# Altium PCB Radar_1GHz.PcbDoc (part 1 of 2)
Units mm, origin at the board's own origin, x right, y up, seen from the top; angles counter-clockwise.
Board outline 125 x 80 mm, 4 copper layers (Top Layer - RF, Layer 1 - GND, Layer 2 - GND, Bottom Layer - PWR), stack 1.591 mm thick; 163 components, 78 nets, 431 pads, 238 vias.
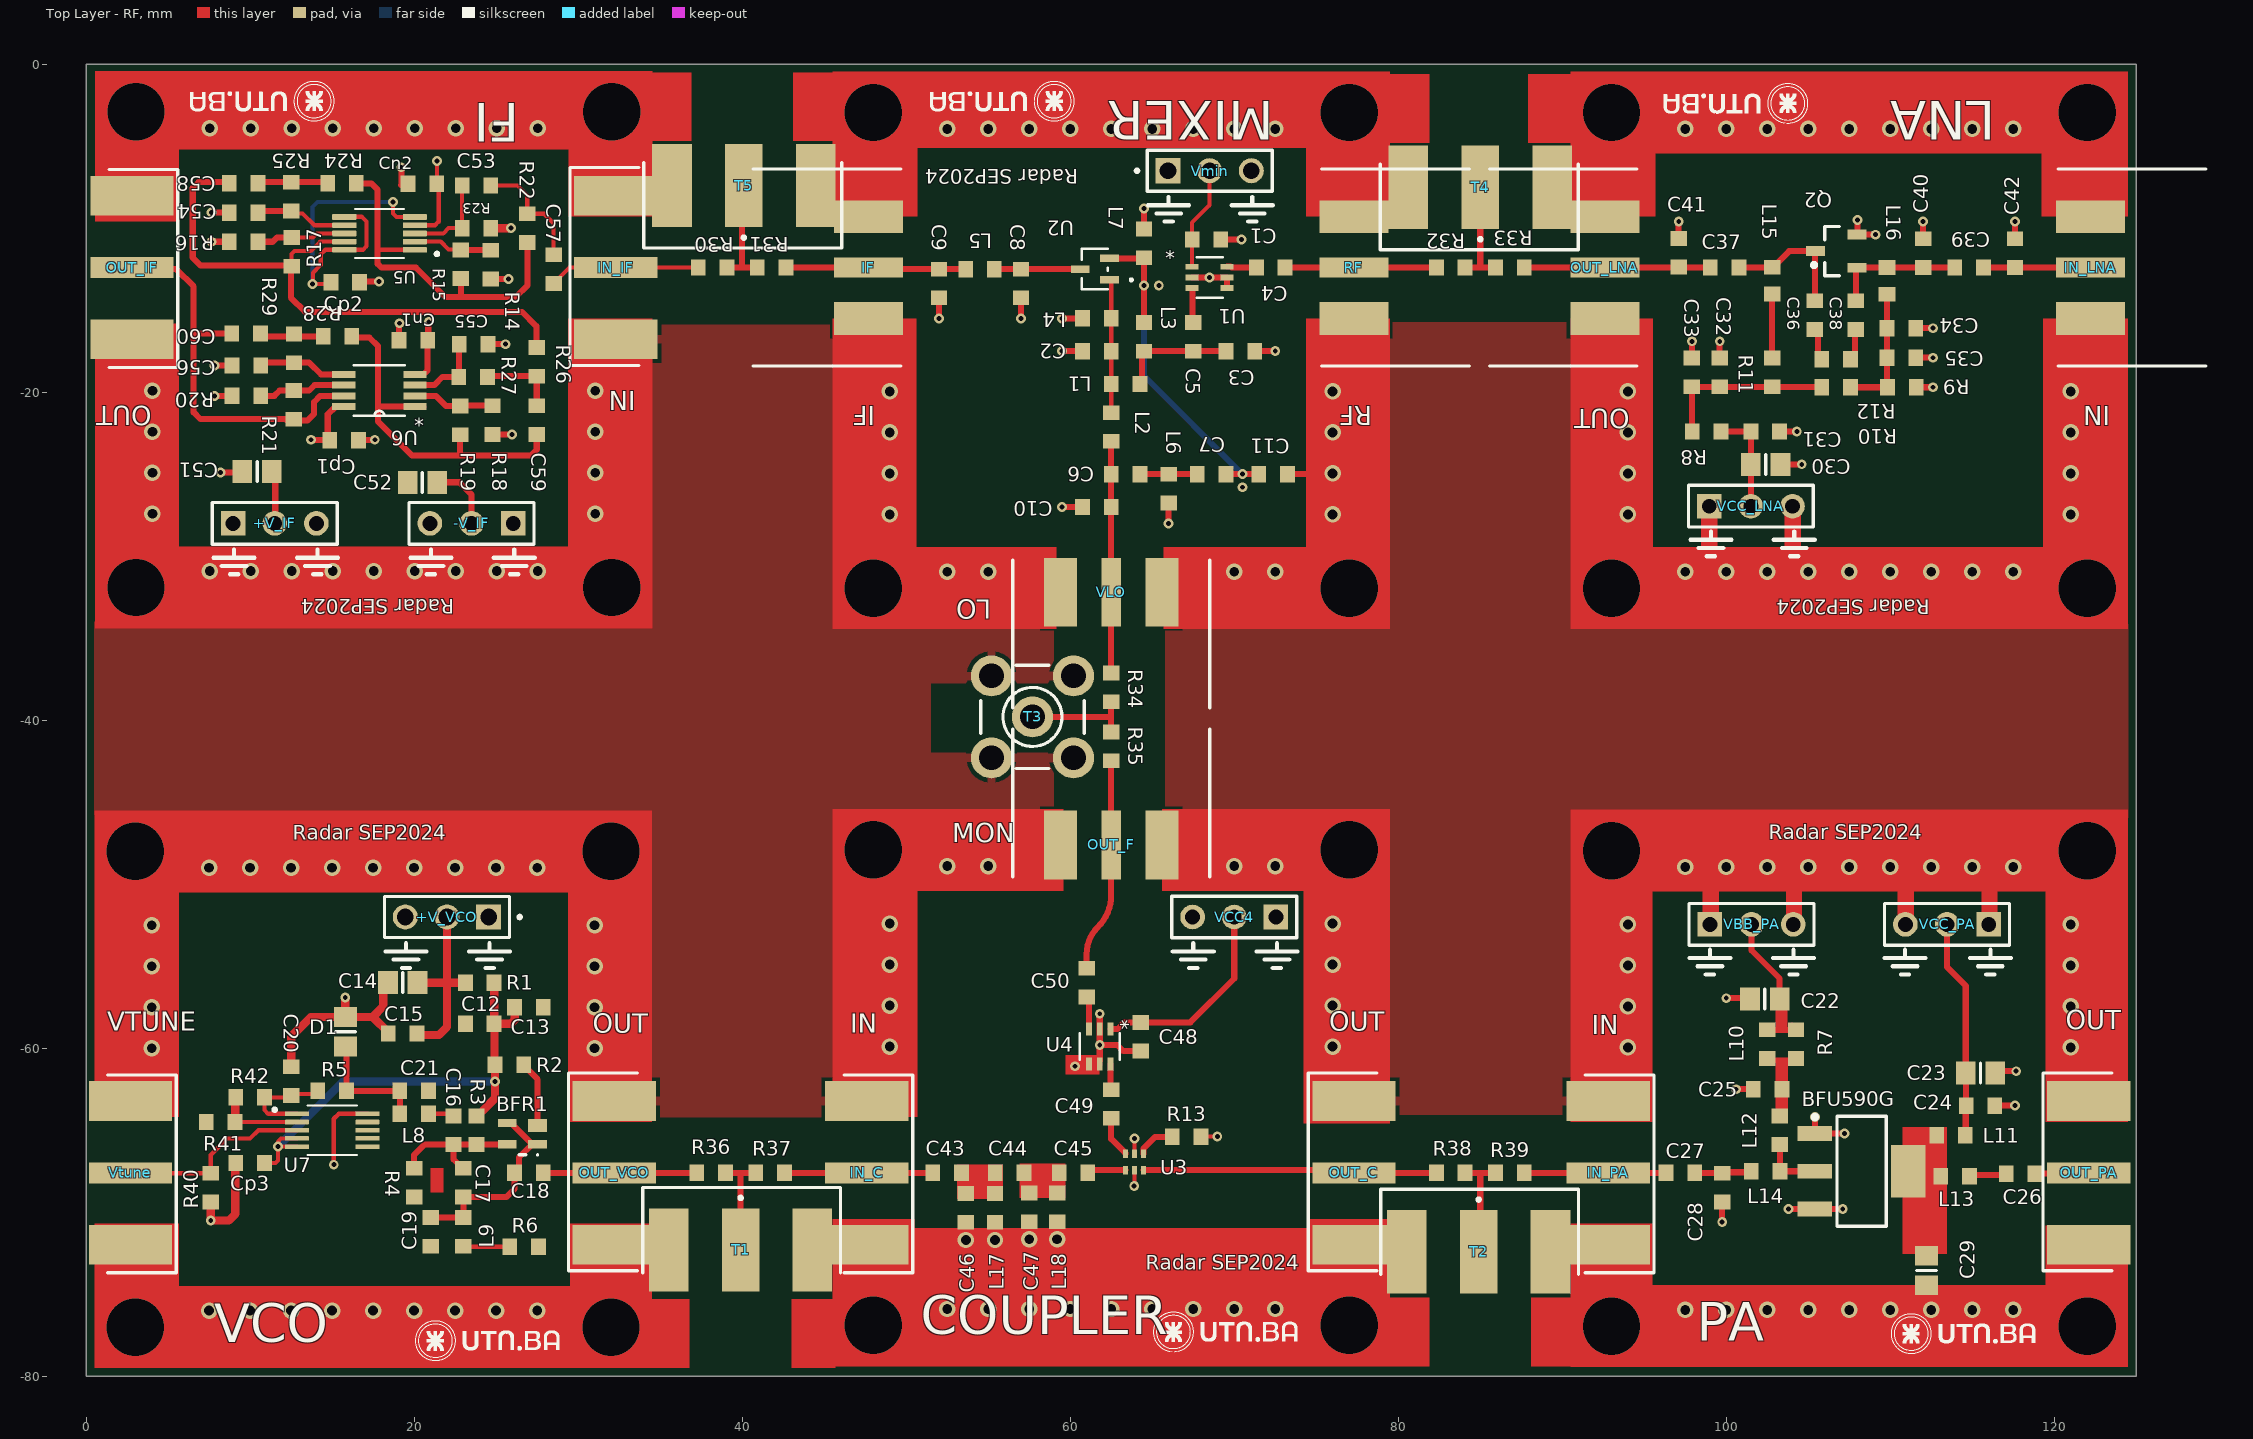
[diagram p0: Top Layer - RF view]
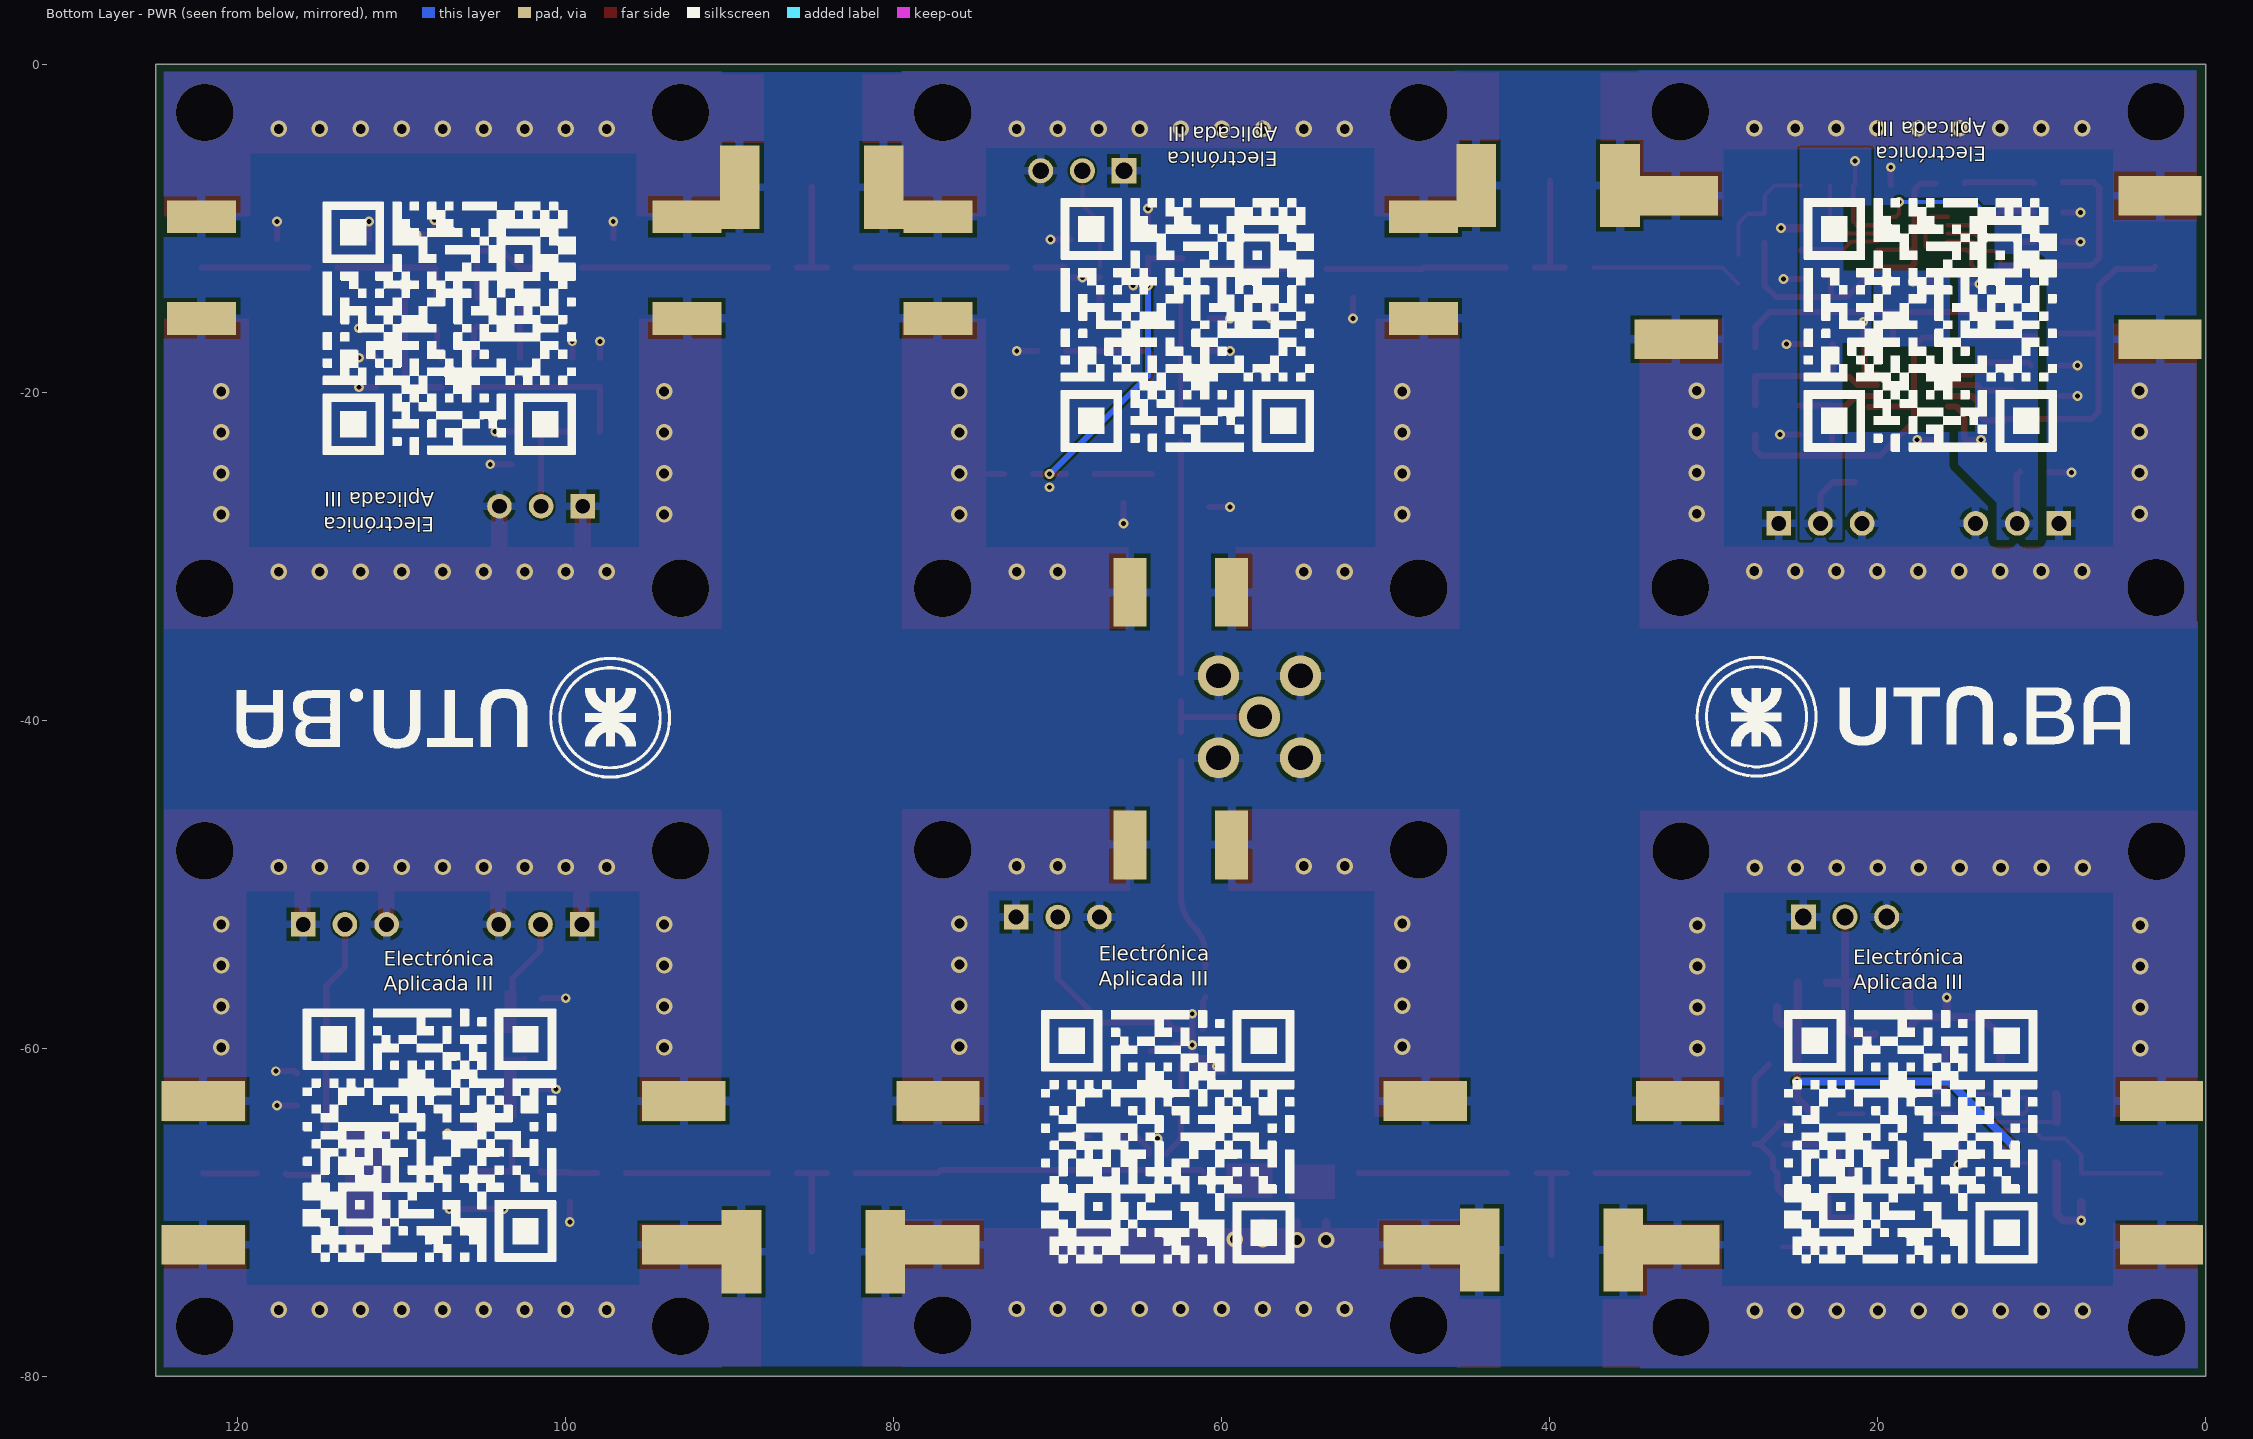
[diagram p1: Bottom Layer - PWR view, seen from below]
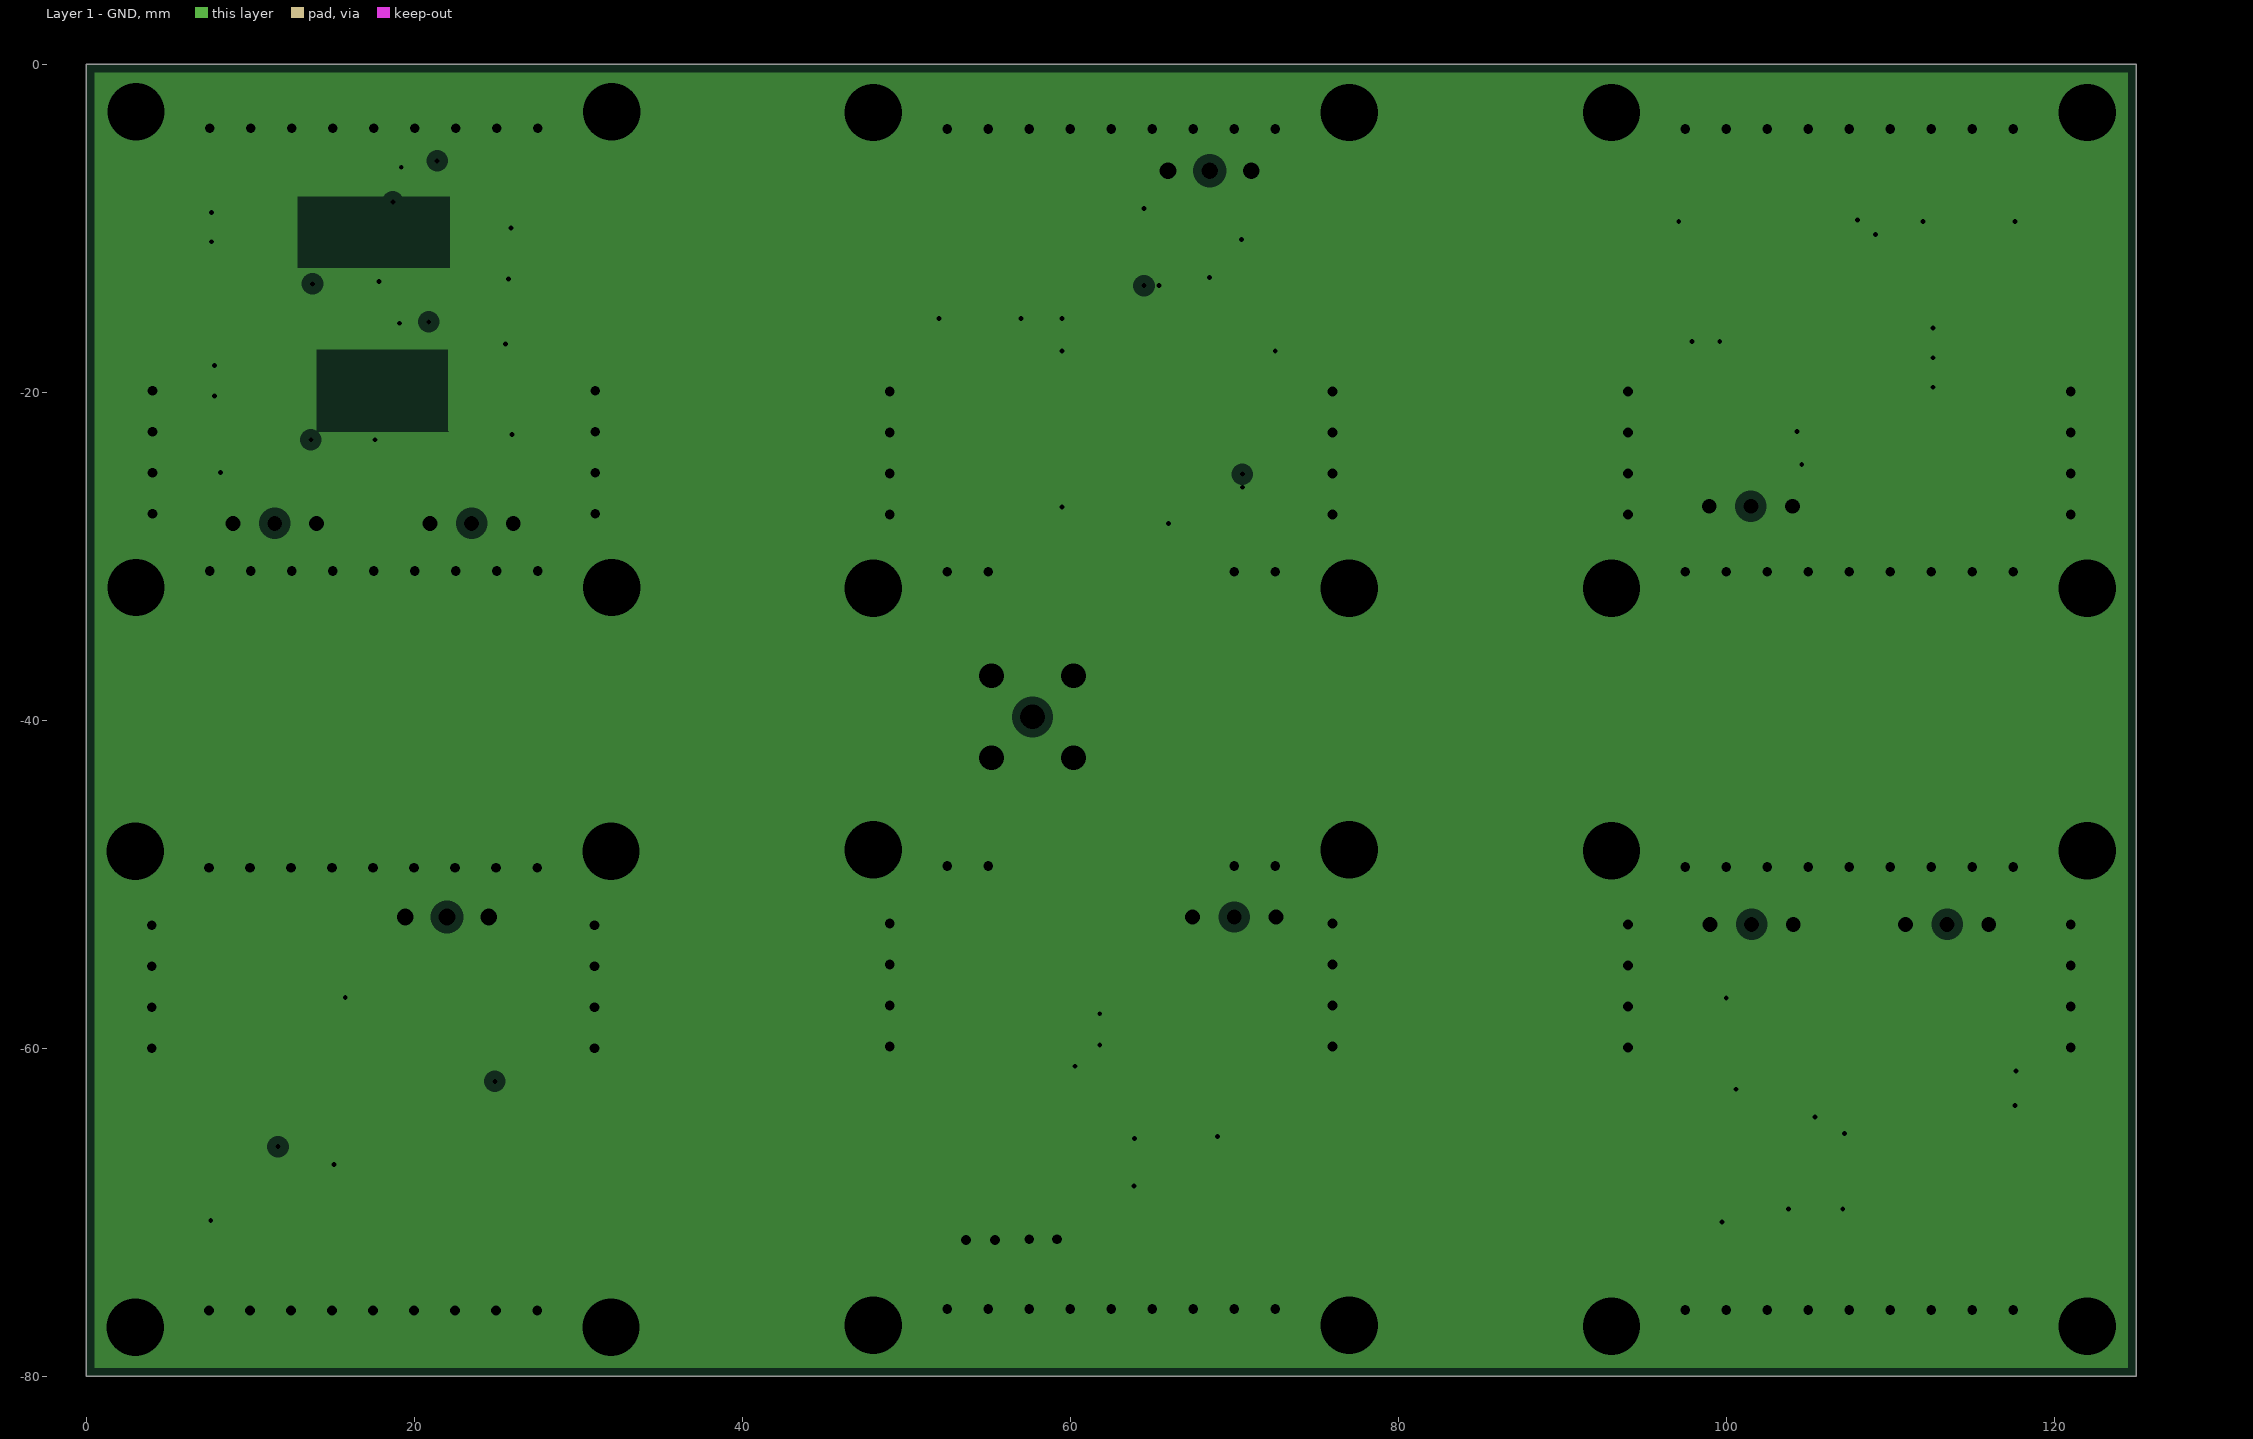
[diagram p2: Layer 1 - GND, clearances drawn from the general rule]
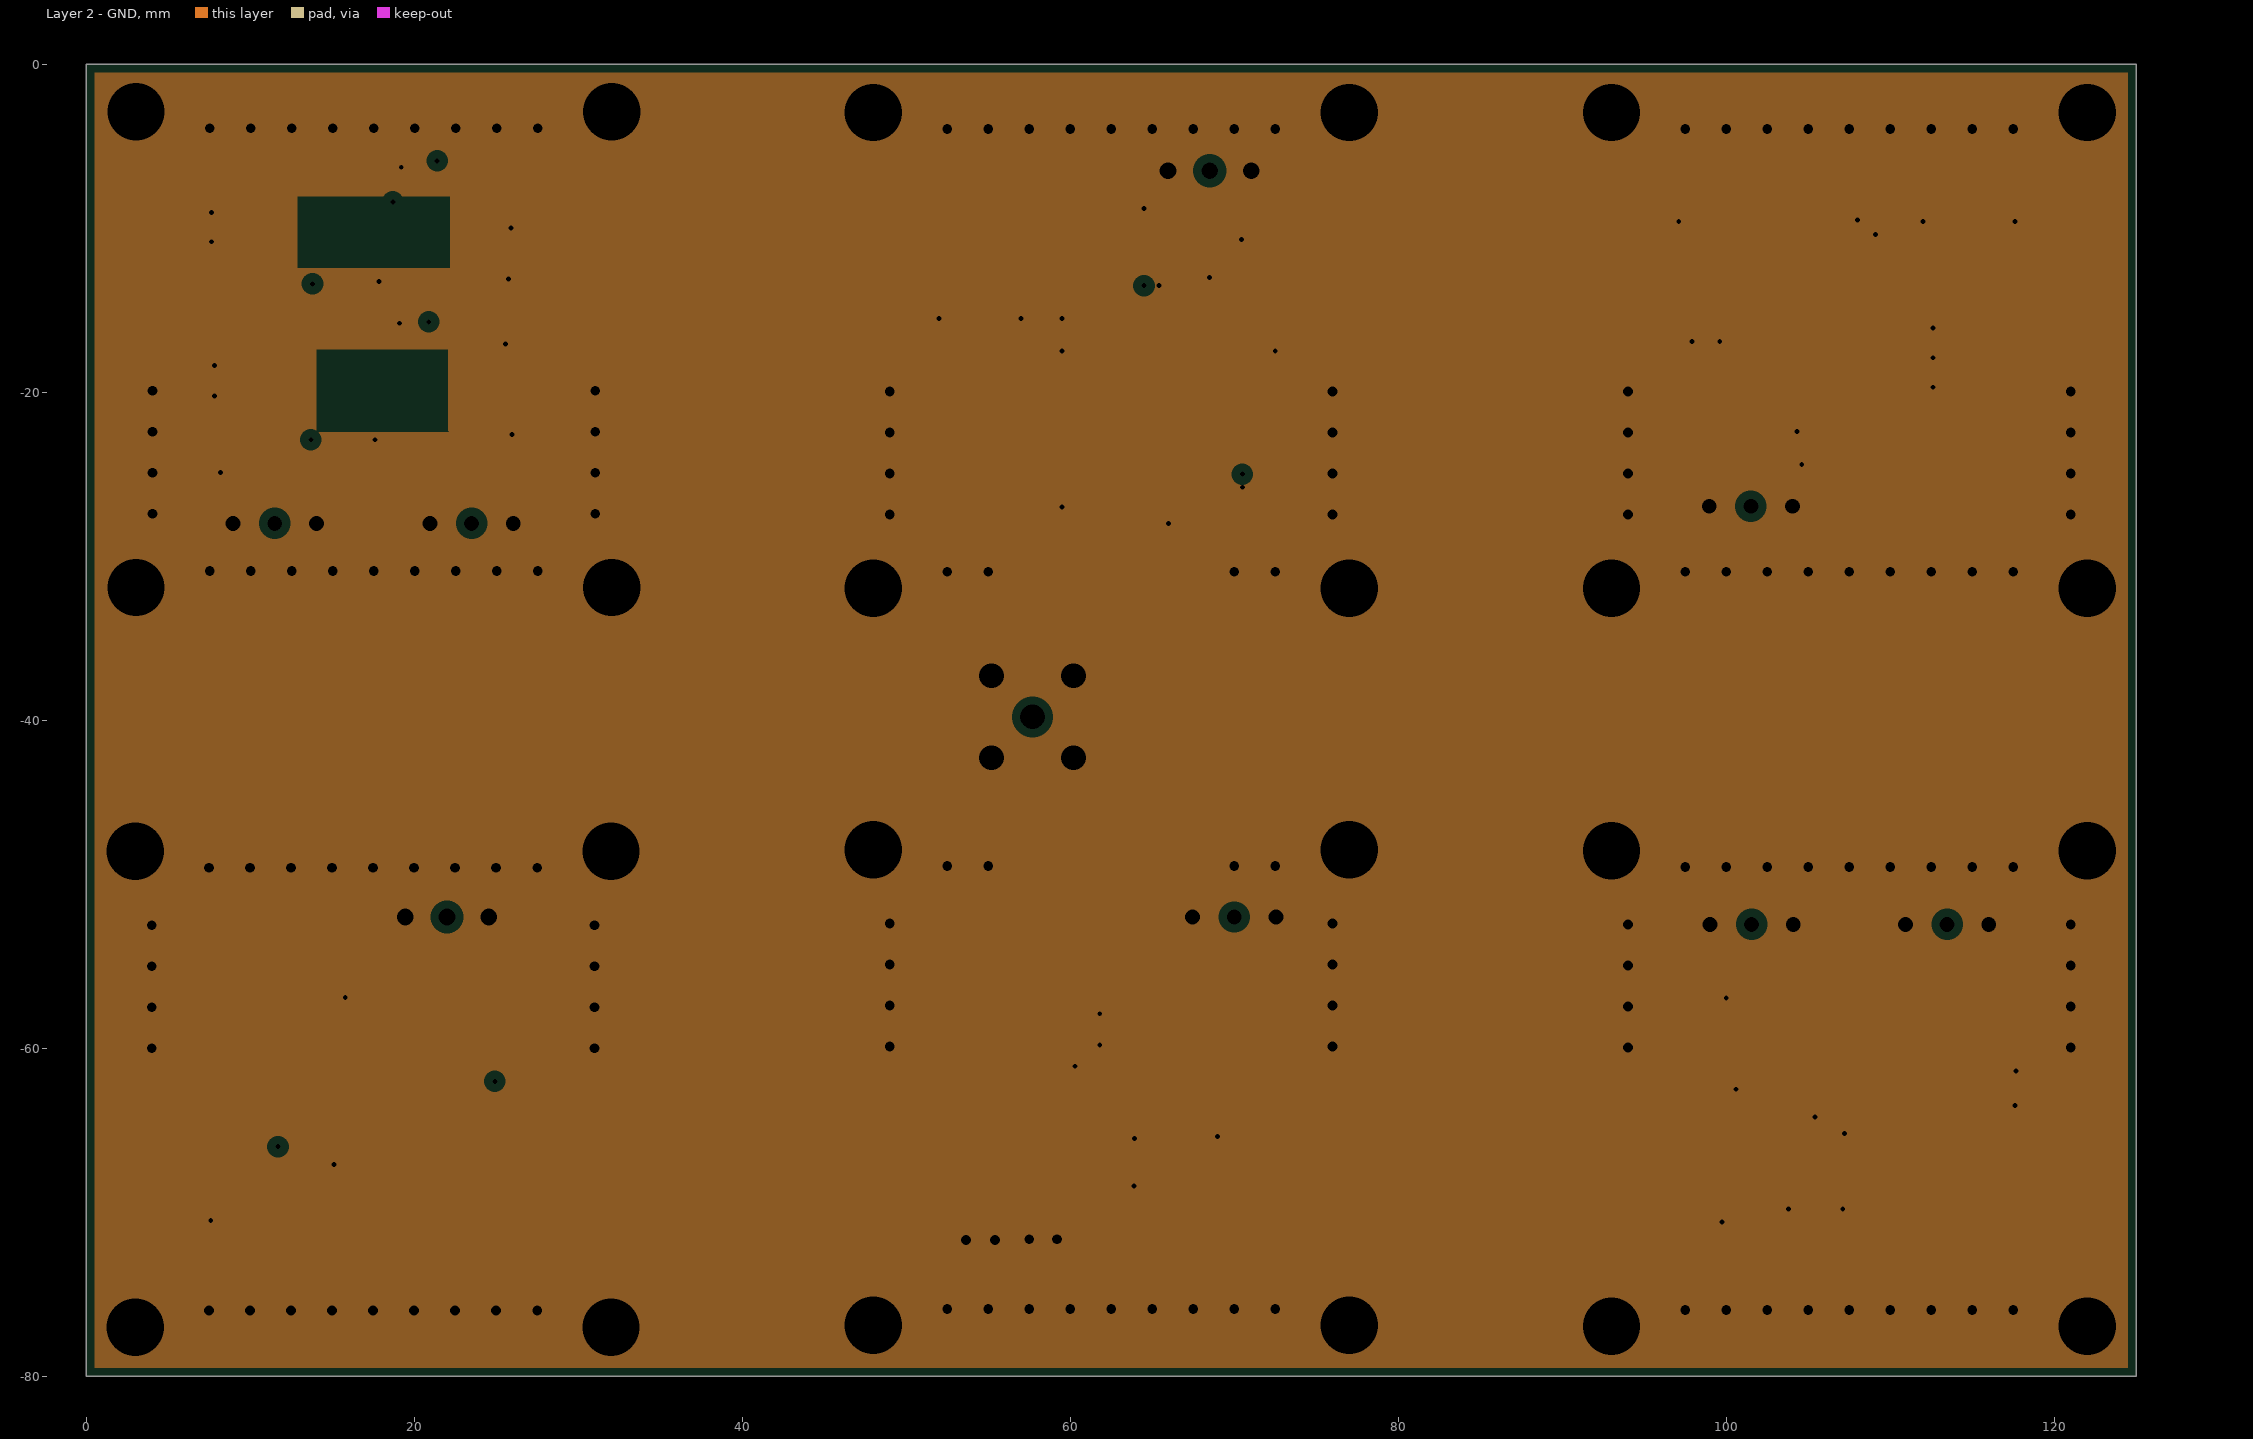
[diagram p3: Layer 2 - GND, clearances drawn from the general rule]

## Layer stack, top to bottom
Top Solder: solder mask 0.0254, SM-001, Dk 4
Top Layer - RF: signal copper 0.035
Prepeg 1: prepreg 0.2104, PP-006, Dk 4.4
Layer 1 - GND: plane copper 0.0175, net GND
Dielectric 1: core 1.065, FR4, Dk 4.6
Layer 2 - GND: plane copper 0.0175, net GND
Prepeg 2: prepreg 0.2104, PP-006, Dk 4.4
Bottom Layer - PWR: signal copper 0.035
Bottom Solder: solder mask 0.0254, SM-001, Dk 4

## Board outline
0,-80 125,-80 125,0 0,0

## Design rules (kind name [scope] priority, off if disabled: settings)
Clearance poly_top [InNamedPolygon('V+_sallen')] p1: gap=0.5 ignorepadtopadclearanceinfootprint=FALSE except(0: Arc-Hole Track-Hole SMDPad-Hole THPad-Hole Via-Hole Fill-Hole Poly-Hole Region-Hole Text-Hole)
Clearance poly_fi [InNamedPolygon('GND_L02_P006')] p2: gap=0.5 ignorepadtopadclearanceinfootprint=FALSE except(0: Arc-Hole Track-Hole SMDPad-Hole THPad-Hole Via-Hole Fill-Hole Poly-Hole Region-Hole Text-Hole)
Clearance poly_dc [InNamedPolygon('GND_L02_P005')] p3: gap=0.5 ignorepadtopadclearanceinfootprint=FALSE except(0: Arc-Hole Track-Hole SMDPad-Hole THPad-Hole Via-Hole Fill-Hole Poly-Hole Region-Hole Text-Hole)
Clearance poly_lna [InNamedPolygon('GND_L02_P004')] p4: gap=0.5 ignorepadtopadclearanceinfootprint=FALSE except(0: Arc-Hole Track-Hole SMDPad-Hole THPad-Hole Via-Hole Fill-Hole Poly-Hole Region-Hole Text-Hole)
Clearance poly_pa [InNamedPolygon('GND_L02_P003')] p5: gap=0.5 ignorepadtopadclearanceinfootprint=FALSE except(0: Arc-Hole Track-Hole SMDPad-Hole THPad-Hole Via-Hole Fill-Hole Poly-Hole Region-Hole Text-Hole)
Clearance poly_vco [InNamedPolygon('GND_L02_P001')] p6: gap=0.5 ignorepadtopadclearanceinfootprint=FALSE except(0: Arc-Hole Track-Hole SMDPad-Hole THPad-Hole Via-Hole Fill-Hole Poly-Hole Region-Hole Text-Hole)
Clearance poly_0 [InNamedPolygon('GND_L02_P000')] p7: gap=0.5 ignorepadtopadclearanceinfootprint=FALSE except(0: Arc-Hole Track-Hole SMDPad-Hole THPad-Hole Via-Hole Fill-Hole Poly-Hole Region-Hole Text-Hole)
Clearance [All] p8: gap=0.127 ignorepadtopadclearanceinfootprint=FALSE except(0: Arc-Hole Track-Hole SMDPad-Hole THPad-Hole Via-Hole Fill-Hole Poly-Hole Region-Hole Text-Hole)
ComponentClearance [All] p1: gap=0.01 collisioncheckmode=3 verticalgap=2540 showdistances=TRUE donotcheckwithout3dbody=TRUE
HoleSize [All] p1: absolutevalues=TRUE maxlimit=5 minlimit=0.025 maxpercent=80.000 minpercent=20.000
MinimumSolderMaskSliver [All] p1: minsoldermaskwidth=0.01
PlaneClearance plane_clearance_vias [IsVia] p1: clearance=0.152
PlaneClearance [All] p2: clearance=0.508
PlaneConnect PlaneConnect_vias [IsVia] p1: planeconnectstyle=Direct reliefexpansion=0.508 reliefentries=4 reliefconductorwidth=0.254 reliefairgap=0.254
PlaneConnect [All] p2: planeconnectstyle=Relief reliefexpansion=0.508 reliefentries=4 reliefconductorwidth=0.254 reliefairgap=0.254
PolygonConnect PolygonConnect_via [IsVia vs IsPolygon] p1: connectstyle=Direct reliefconductorwidth=0.254 reliefentries=4 polygonreliefangle="90 Angle" airgapwidth=0.254
PolygonConnect [All] p2: connectstyle=Relief reliefconductorwidth=0.5 reliefentries=4 polygonreliefangle="90 Angle" airgapwidth=0.254
RoomDefinition LOW_NOISE_AMPLIFIER [InComponentClass('LOW_NOISE_AMPLIFIER')] p1: confinementstyle=ConfineIn formatcopy=TRUE lockcomponents=FALSE outline 84.7,-40.3 130.1,-40.3 130.1,4.4 84.7,4.4
RoomDefinition DIRECTIONAL_COUPLER [InComponentClass('DIRECTIONAL_COUPLER')] p2: confinementstyle=ConfineIn formatcopy=TRUE lockcomponents=FALSE outline 40.3,-84 85.1,-84 85.1,-40 40.3,-40
RoomDefinition AMPLIFIER_IF [InComponentClass('AMPLIFIER_IF')] p3: confinementstyle=ConfineIn formatcopy=TRUE lockcomponents=FALSE outline -7.3,-41.2 40.3,-41.2 40.3,9.3 -7.3,9.3
RoomDefinition VCO [InComponentClass('VCO')] p4: confinementstyle=ConfineIn formatcopy=TRUE lockcomponents=FALSE outline -7.2,-84.5 39.4,-84.5 39.4,-39.8 -7.2,-39.8
RoomDefinition POWER_AMPLIFIER [InComponentClass('POWER_AMPLIFIER')] p5: confinementstyle=ConfineIn formatcopy=TRUE lockcomponents=FALSE outline 85.1,-85.4 134,-85.4 134,-39.3 85.1,-39.3
RoomDefinition MIXER [InComponentClass('MIXER')] p6: confinementstyle=ConfineIn formatcopy=TRUE lockcomponents=FALSE outline 38.9,-41.2 85.5,-41.2 85.5,8.4 38.9,8.4
RoomDefinition Completo [InComponentClass('Completo')] p7: confinementstyle=ConfineIn formatcopy=TRUE lockcomponents=FALSE outline -47,-96.7 127.4,-96.7 127.4,22.1 -47,22.1
RoutingVias [All] p1: holewidth=0.3 width=0.3 viastyle="Through Hole" minholewidth=0.2 minwidth=0.4 maxholewidth=0.3 maxwidth=0.3
SilkToSilkClearance [All] p1: silktosilkclearance=0.1
SilkToSolderMaskClearance [IsPad] p1: minsilkscreentomaskgap=0.152 clearancetoexposedcopper=TRUE
SolderMaskExpansion [All] p1: expansion=0.102 istentingtop=FALSE
SupplyNets "Schematic Supply Nets_3" [InNet('VCO+')] p1: voltage=0.000
SupplyNets "Schematic Supply Nets_2" [InNet('V-')] p2: voltage=0.000
SupplyNets "Schematic Supply Nets_1" [InNet('GND')] p3: voltage=0.000
SupplyNets "Schematic Supply Nets" [InNet('V+')] p4: voltage=0.000
Width GND_Width [InNet('GND')] p1: maxlimit=2.54 minlimit=0 preferedwidth=0.254 minimp=50.000000 maximp=50.000000 favimp=50.000000
Width RF50R [InNetClass('RF50R')] p2: maxlimit=2.54 minlimit=0.254 preferedwidth=0.368 impedanceprofiledriven=TRUE impedanceprofileid={3E6CA8BA-64D6-413C-9399-F518D5D78D00} impedanceprofilevalue=50.000000 minimp=50.000000 maximp=50.000000 favimp=50.000000
Width Width_1 [All] p3: maxlimit=0.508 minlimit=0.254 preferedwidth=0.254 minimp=50.000000 maximp=50.000000 favimp=50.000000
23 further rules are at their usual default settings.

## Classes and differential pairs
net class RF50R: B C GND Net+V_VCO_02 NetBFR1_1 NetBFU590G_2 NetBFU590G_4 NetC3_1 NetC4_1 NetC4_2 NetC5_1 NetC6_1 NetC6_2 NetC8_2 NetC9_2 NetC16_2 NetC18_1 NetC20_2 NetC21_1 NetC22_1 NetC23_1 NetC25_2 NetC26_1 NetC26_2 NetC27_1 NetC27_2 NetC32_1 NetC34_2 NetC36_1 NetC36_2 NetC37_2 NetC38_1 NetC38_2 NetC39_1 NetC43_1 NetC43_2 NetC44_2 NetC45_2 NetC48_2 NetC49_1 NetC49_2 NetC50_1 NetC50_2 NetL9_1 NetL15_2 NetOUT_C_1 NetR13_2 NetR30_2 NetR32_2 NetR34_1 NetR36_2 NetR38_2 NetR40_2 NetR41_2 p3 p4 VCO+
component class Completo: R30 R31 R32 R33 R34 R35 R36 R37 R38 R39 T1 T2 T3 T4 T5
component class AMPLIFIER_IF: +V_IF -V_IF C51 C52 C53 C54 C55 C56 C57 C58 C59 C60 Cn1 Cn2 Cp1 Cp2 IN_IF OUT_IF R14 R15 R16 R17 R18 R19 R20 R21 R22 R23 R24 R25 R26 R27 R28 R29 U5 U6
component class DIRECTIONAL_COUPLER: C43 C44 C45 C46 C47 C48 C49 C50 IN_C L17 L18 OUT_C OUT_F R13 U3 U4 VCC4
component class LOW_NOISE_AMPLIFIER: C30 C31 C32 C33 C34 C35 C36 C37 C38 C39 C40 C41 C42 IN_LNA L15 L16 OUT_LNA Q2 R8 R9 R10 R11 R12 VCC_LNA
component class POWER_AMPLIFIER: BFU590G C22 C23 C24 C25 C26 C27 C28 C29 IN_PA L10 L11 L12 L13 L14 OUT_PA R7 VBB_PA VCC_PA
component class VCO: +V_VCO BFR1 C12 C13 C14 C15 C16 C17 C18 C19 C20 C21 Cp3 D1 L8 L9 OUT_VCO Q R1 R2 R3 R4 R5 R6 R40 R41 R42 U7 Vtune
component class MIXER: C1 C2 C3 C4 C5 C6 C7 C8 C9 C10 C11 IF L1 L2 L3 L4 L5 L6 L7 RF U1 U2 VLO Vmin

## Components (designator, comment, footprint, x,y, rotation, side; value= is the part's Value field where it differs from the comment)
+V_IF "Header 3" HDR1X3 8.96,-28 r0 top
+V_VCO "HTSW-103-XX-X-S" SAMTEC_HTSW-103-XX-X-S 22,-52 r0 top
-V_IF "Header 3" HDR1X3 26.04,-28 r180 top
BFR1 "BFP420" SOT-343_N 26.6,-65.2 r180 top
BFU590G "NPN" SOT223_L 108.25,-67.5 r0 top
C1 "Cap 0603" CAPC1608X90N 68.308,-10.692 r180 top value=0.6pF
C2 "Cap 0603" CAPC1608X90N 61.625,-17.5 r180 top value=0.6pF
C3 "Cap 0603" CAPC1608X90N 70.375,-17.5 r0 top value=0.6pF
C4 "Cap 0603" CAPC1608X90N 72.225,-12.4 r180 top value=0.6pF
C5 "Cap 0603" CAPC1608X90N 67.5,-16.625 r270 top value=0.6pF
C6 "Cap 0603" CAPC1608X90N 63.375,-25 r0 top value=0.6pF
C7 "Cap 0603" CAPC1608X90N 68.625,-25 r0 top value=0.6pF
C8 "Cap 0603" CAPC1608X90N 57,-13.375 r90 top value=0.6pF
C9 "Cap 0603" CAPC1608X90N 52,-13.375 r90 top value=0.6pF
C10 "Cap 0603" CAPC1608X90N 61.625,-27 r0 top value=0.6pF
C11 "Cap 0603" CAPC1608X90N 72.375,-25 r180 top value=0.6pF
C12 "Cap 0603" CAPC1608X90N 24,-58.5 r0 top value=0.6pF
C13 "Cap 0603" CAPC1608X90N 27,-57.5 r180 top value=0.6pF
C14 "1uF" 6-0805_N 19.3,-56 r180 top value=22nF
C15 "Cap 0603" CAPC1608X90N 19.3,-59.1 r0 top value=0.6pF
C16 "Cap 0603" CAPC1608X90N 22.4,-65 r90 top value=0.6pF
C17 "Cap 0603" CAPC1608X90N 23,-68.2 r90 top value=0.6pF
C18 "Cap 0603" CAPC1608X90N 27,-67.6 r180 top value=0.6pF
C19 "Cap 0603" CAPC1608X90N 21,-71.2 r90 top value=0.6pF
C20 "Cap 0603" CAPC1608X90N 12.5,-62 r270 top value=0.6pF
C21 "Cap 0603" CAPC1608X90N 20,-62.6 r0 top value=0.6pF
C22 "10uF" 6-0805_N 102.35,-57 r180 top
C23 "22nF" 6-0805_N 115.5,-61.5 r0 top
C24 "Cap 0603" CAPC1608X90N 115.5,-63.5 r0 top value=0.6pF
C25 "Cap 0603" CAPC1608X90N 102.525,-62.5 r0 top value=0.6pF
C26 "Cap 0603" CAPC1608X90N 117.95,-67.65 r0 top value=0.6pF
C27 "Cap 0603" CAPC1608X90N 97.2,-67.6 r0 top value=0.6pF
C28 "Cap 0603" CAPC1608X90N 99.75,-68.5 r90 top value=0.6pF
C29 "no mounted" 6-0805_N 112.2,-73.55 r270 top value=100pF
C30 "22nF" 6-0805_N 102.4,-24.4 r0 top
C31 "Cap 0603" CAPC1608X90N 102.375,-22.4 r0 top value=0.6pF
C32 "Cap 0603" CAPC1608X90N 99.6,-18.8 r90 top value=0.6pF
C33 "Cap 0603" CAPC1608X90N 97.9,-18.8 r90 top value=0.6pF
C34 "Cap 0603" CAPC1608X90N 110.675,-16.1 r180 top value=0.6pF
C35 "Cap 0603" CAPC1608X90N 110.675,-17.9 r180 top value=0.6pF
C36 "Cap 0603" CAPC1608X90N 105.4,-15.3 r270 top value=0.6pF
C37 "Cap 0603" CAPC1608X90N 99.9,-12.4 r180 top value=0.6pF
C38 "Cap 0603" CAPC1608X90N 107.9,-15.3 r270 top value=0.6pF
C39 "Cap 0603" CAPC1608X90N 114.8,-12.4 r180 top value=0.6pF
C40 "Cap 0603" CAPC1608X90N 112,-11.525 r270 top value=0.6pF
C41 "Cap 0603" CAPC1608X90N 97.1,-11.5 r270 top value=0.6pF
C42 "Cap 0603" CAPC1608X90N 117.6,-11.525 r270 top value=0.6pF
C43 "Cap 0603" CAPC1608X90N 52.5,-67.6 r0 top value=0.6pF
C44 "Cap 0603" CAPC1608X90N 56.3,-67.6 r0 top value=0.6pF
C45 "Cap 0603" CAPC1608X90N 60.2,-67.6 r0 top value=0.6pF
C46 "Cap 0603" CAPC1608X90N 53.636,-69.74 r90 top value=0.6pF
C47 "Cap 0603" CAPC1608X90N 57.5,-69.7 r90 top value=0.6pF
C48 "Cap 0603" CAPC1608X90N 64.3,-59.3 r90 top value=0.6pF
C49 "Cap 0603" CAPC1608X90N 62.5,-63.4 r90 top value=0.6pF
C50 "Cap 0603" CAPC1608X90N 61,-56 r90 top value=0.6pF
C51 "1uF" 6-0805_N 10.425,-24.85 r180 top
C52 "1uF" 6-0805_N 20.5,-25.5 r0 top
C53 "Cap 0603" CAPC1608X90N 23.8,-7.4 r0 top value=0.6pF
C54 "Cap 0603" CAPC1608X90N 9.599,-9.052 r0 top value=0.6pF
C55 "Cap 0603" CAPC1608X90N 23.625,-17.075 r180 top value=0.6pF
C56 "Cap 0603" CAPC1608X90N 9.775,-18.375 r0 top value=0.6pF
C57 "Cap 0603" CAPC1608X90N 28.5,-12.5 r270 top value=0.6pF
C58 "Cap 0603" CAPC1608X90N 9.599,-7.274 r0 top value=0.6pF
C59 "Cap 0603" CAPC1608X90N 27.475,-21.7 r90 top value=0.6pF
C60 "Cap 0603" CAPC1608X90N 9.75,-16.425 r0 top value=0.6pF
Cn1 "Cap 0603" CAPC1608X90N 19.95,-16.825 r0 top value=0.6pF
Cn2 "Cap 0603" CAPC1608X90N 20.5,-7.3 r0 top value=0.6pF
Cp1 "Cap 0603" CAPC1608X90N 15.725,-22.925 r180 top value=0.6pF
Cp2 "Cap 0603" CAPC1608X90N 15.8,-13.3 r180 top value=0.6pF
Cp3 "Cap 0603" CAPC1608X90N 10,-67 r180 top value=0.6pF
D1 "SMV1232" 6-0805_N 15.8,-59 r270 top
IF "SMA" SMA-142-0701-851#1 47.7,-12.4 r270 top
IN_C "SMA" SMA-142-0701-851_V2 47.6,-67.6 r270 top
IN_IF "SMA" SMA-142-0701-851_V2 32.3,-12.4 r90 top
IN_LNA "SMA" SMA-142-0701-851#1 122.2,-12.4 r90 top
IN_PA "SMA" SMA-142-0701-851_V2 92.8,-67.6 r270 top
L1 "LQW18" INDC1608X100N#1 63.375,-19.5 r0 top value=1nHy
L2 "LQW18" INDC1608X100N#1 62.5,-22.125 r90 top value=1nHy
L3 "LQW18" INDC1608X100N#1 64.5,-16.625 r270 top value=1nHy
L4 "LQW18" INDC1608X100N#1 61.625,-15.5 r180 top value=1nHy
L5 "LQW18" INDC1608X100N#1 54.5,-12.5 r180 top value=1nHy
L6 "LQW18" INDC1608X100N#1 66,-25.875 r90 top value=1nHy
L7 "LQW18" INDC1608X100N#1 64.5,-10.925 r270 top value=1nHy
L8 "LQW18" INDC1608X100N#1 20,-64 r0 top value=1nHy
L9 "LQW18" INDC1608X100N#1 23,-71.2 r90 top value=1nHy
L10 "LQW18" INDC1608X100N#1 102.5,-59.75 r90 top value=1nHy
L11 "LQW18" INDC1608X100N#1 113.7,-65.3 r0 top value=1nHy
L12 "LQW18" INDC1608X100N#1 103.25,-65 r90 top value=1nHy
L13 "LQW18" INDC1608X100N#1 113.95,-67.8 r0 top value=1nHy
L14 "LQW18" INDC1608X100N#1 102.4,-67.5 r0 top value=1nHy
L15 "LQW18" INDC1608X100N#2 102.8,-13.2 r270 top
L16 "LQW18" INDC1608X100N#2 109.8,-13.214 r270 top
L17 "LQW18" INDC1608X100N#1 55.414,-69.74 r90 top value=1nHy
L18 "LQW18" INDC1608X100N#1 59.2,-69.7 r90 top value=1nHy
OUT_C "SMA" SMA-142-0701-851_V2 77.3,-67.6 r90 top
OUT_F "SMA" SMA-142-0701-851#1 62.5,-47.6 r180 top locked
OUT_IF "SMA" SMA-142-0701-851_V2 2.8,-12.4 r270 top
OUT_LNA "SMA" SMA-142-0701-851#1 92.6,-12.4 r270 top
OUT_PA "SMA" SMA-142-0701-851_V2 122.1,-67.6 r90 top
OUT_VCO "SMA" SMA-142-0701-851_V2 32.2,-67.6 r90 top
Q2 "NPN" SOT23_N 106.7,-11.4 r180 top
R1 "Resistor" RESC1508X55N 24,-56 r0 top value="10 ohms"
R2 "Resistor" RESC1508X55N 25.8,-61 r180 top value="10 ohms"
R3 "Resistor" RESC1508X55N 23.8,-65 r90 top value="10 ohms"
R4 "Resistor" RESC1508X55N 20,-68.2 r90 top value="10 ohms"
R5 "Resistor" RESC1508X55N 15,-62.6 r180 top value="10 ohms"
R6 "Resistor" RESC1508X55N 26.7,-72.1 r180 top value="10 ohms"
R7 "Resistor" RESC1508X55N 104.25,-59.75 r90 top value="10 ohms"
R8 "Resistor" RESC1508X55N 98.8,-22.4 r0 top value="10 ohms"
R9 "Resistor" RESC1508X55N 110.7,-19.7 r0 top value="10 ohms"
R10 "Resistor" RESC1508X55N 106.7,-19.7 r180 top value="10 ohms"
R11 "Resistor" RESC1508X55N 102.8,-18.8 r270 top value="10 ohms"
R12 "Resistor" RESC1508X55N 106.7,-18 r180 top value="10 ohms"
R13 "Resistor" RESC1508X55N 67.1,-65.4 r180 top value="10 ohms"
R14 "Resistor" RESC1508X55N 24.675,-12.225 r90 top value="10 ohms"
R15 "Resistor" RESC1508X55N 22.85,-12.2 r270 top value="10 ohms"
R16 "Resistor" RESC1508X55N 9.599,-10.83 r0 top value="10 ohms"
R17 "Resistor" RESC1508X55N 12.525,-11.45 r270 top value="10 ohms"
R18 "Resistor" RESC1508X55N 24.775,-21.7 r90 top value="10 ohms"
R19 "Resistor" RESC1508X55N 22.8,-21.725 r270 top value="10 ohms"
R20 "Resistor" RESC1508X55N 9.775,-20.225 r0 top value="10 ohms"
R21 "Resistor" RESC1508X55N 12.65,-20.775 r270 top value="10 ohms"
R22 "Resistor" RESC1508X55N 26.9,-10 r270 top value="10 ohms"
R23 "Resistor" RESC1508X55N 23.8,-10 r180 top value="10 ohms"
R24 "Resistor" RESC1508X55N 15.6,-7.275 r180 top value="10 ohms"
R25 "Resistor" RESC1508X55N 12.5,-8.075 r270 top value="10 ohms"
R26 "Resistor" RESC1508X55N 27.475,-18.15 r270 top value="10 ohms"
R27 "Resistor" RESC1508X55N 23.6,-19.075 r180 top value="10 ohms"
R28 "Resistor" RESC1508X55N 15.325,-16.6 r180 top value="10 ohms"
R29 "Resistor" RESC1508X55N 12.675,-17.325 r270 top value="10 ohms"
R30 "Resistor" RESC1508X55N 38.2,-12.4 r0 top value="10 ohms"
R31 "Resistor" RESC1508X55N 41.8,-12.4 r0 top value="10 ohms"
R32 "Resistor" RESC1508X55N 83.2,-12.4 r0 top value="10 ohms"
R33 "Resistor" RESC1508X55N 86.8,-12.4 r0 top value="10 ohms"
R34 "Resistor" RESC1508X55N 62.5,-38 r90 top value="10 ohms"
R35 "Resistor" RESC1508X55N 62.5,-41.6 r90 top value="10 ohms"
R36 "Resistor" RESC1508X55N 38.1,-67.6 r0 top value="10 ohms"
R37 "Resistor" RESC1508X55N 41.7,-67.6 r0 top value="10 ohms"
R38 "Resistor" RESC1508X55N 83.2,-67.6 r0 top value="10 ohms"
R39 "Resistor" RESC1508X55N 86.8,-67.6 r0 top value="10 ohms"
R40 "Resistor" RESC1508X55N 7.6,-68.5 r90 top value="10 ohms"
R41 "Resistor" RESC1508X55N 8.2,-64.5 r0 top value="10 ohms"
R42 "Resistor" RESC1508X55N 10,-63 r0 top value="10 ohms"
RF "SMA" SMA-142-0701-851#1 77.3,-12.4 r90 top
T1 "SMA" SMA-142-0701-851#2 39.9,-72.3 r0 top
T2 "SMA" SMA-142-0701-851#2 84.9,-72.4 r0 top
T3 "SMB" SMB_V-RJ45 57.7,-39.8 r270 top
T4 "SMA" SMA-142-0701-851#2 85,-7.5 r180 top
T5 "SMA" SMA-142-0701-851#2 40.1,-7.4 r180 top
U1 "BGA2866,115" SOT363_NXP 68.5,-13 r0 top
U2 "BAT1504W" SOT_327XTSA1_INF 61.5,-12.5 r90 top
U3 "HHM2215SA5" HHM-6_1P6X0P8 63.923,-66.938 r90 top
U4 "BGA2866,115" SOT363_NXP 61.8,-59.9 r270 top
U5 "LMP7712MMNOPB" SOP50P490X110-10N#1 17.89,-10.322 r180 top
U6 "OPA2322AIDGKR_1" DGK8 17.875,-19.9 r180 top
U7 "LMP7712MMNOPB" SOP50P490X110-10N#2 15,-65 r0 top
VBB_PA "Header 3" HDR1X3 99,-52.45 r0 top
VCC4 "Header 3" HDR1X3 72.54,-52 r180 top
VCC_LNA "Header 3" HDR1X3 98.96,-26.95 r0 top
VCC_PA "Header 3" HDR1X3 116,-52.45 r180 top
VLO "SMA" SMA-142-0701-851#1 62.5,-32.2 r0 top
Vmin "HTSW-103-XX-X-S" SAMTEC_HTSW-103-XX-X-S 68.5,-6.5 r180 top
Vtune "SMA" SMA-142-0701-851_V2 2.7,-67.6 r270 top

## Footprints (in the part's own frame and the unit in brackets; to place one, negate y for a bottom-side part, rotate by r counter-clockwise, add the part's x,y. Pads: shape width x height; smd on the part's side, far side on the other; paste and mask are expansions set on the pad)
6-0805_N [mm] "Chip Resistor, Body 2.0x1.2mm, IPC Medium Density"
  rect 1.2x1.4 smd: 1(-0.9,0) 2(0.9,0)
  silkscreen extent 0,-0.6 0,0.6, body extent -1.07,-0.7 1.07,0.7, height 0.7
CAPC1608X90N [mm]
  rect 0.9x1 smd: 1(-0.875,0) 2(0.875,0)
  body extent -0.8,-0.41 0.8,0.41, height 0.89
DGK8 [mil]
  rect 56x17 smd paste-28 mask-28: 1(-85.5,38.39) 2(-85.5,12.8) 3(-85.5,-12.8) 4(-85.5,-38.39) 5(85.5,-38.39) 6(85.5,-12.8) 7(85.5,12.8) 8(85.5,38.39)
  silkscreen extent -61,-61 61,61, body extent -99,-61 99,61, height 43
HDR1X3 [mm] "Connector; Header; 3 Position"
  rect 1.5x1.5 hole 0.9: 1(0,0)
  round 1.5 hole 0.9: 2(2.54,0) 3(5.08,0)
  silkscreen extent -1.27,-1.27 6.35,1.27
HHM-6_1P6X0P8 [mil]
  rect 20x12 smd paste+0 mask+0: 1(-19.69,21.65) 2(-19.69,0) 3(-19.69,-21.65) 4(19.69,-21.65) 5(19.69,0) 6(19.69,21.65)
  body extent -19,-34 19,34, height 28
INDC1608X100N#1 [mm] "Inductor LQW0603"
  rect 0.9x1 smd: 1(-0.875,0) 2(0.875,0)
  body extent -0.8,-0.38 0.8,0.42, height 1
INDC1608X100N#2 [mm]
  rect 0.89x1.02 smd: 1(-0.814,0) 2(0.814,0)
  body extent -0.8,-0.38 0.8,0.42, height 1
RESC1508X55N [mm]
  rect 0.9x1 smd: 1(-0.875,0) 2(0.875,0)
  body extent -0.77,-0.4 0.78,0.4, height 0.55
SAMTEC_HTSW-103-XX-X-S [mm]
  rect 1.53x1.53 hole 1.02: 01(2.54,0)
  round 1.53 hole 1.02: 02(0,0) 03(-2.54,0)
  silkscreen extent -3.81,-1.24 4.53,1.24
SMA-142-0701-851#1 [mm] "SMA 50 Ohm, End Launch Jack Receptacle, Tab Contact"
  rect 1.2x4.2 smd: 1(0,0)
  rect 2x4.2 smd: 2(-3.1,0) 2(3.1,0)
  rect 2x4.2 smd far side: 2(-3.1,0) 2(3.1,0)
  silkscreen extent -6,-7.04 6,1.96
SMA-142-0701-851#2 [mm] "SMA 50 Ohm, End Launch Jack Receptacle, Tab Contact"
  rect 2.286x5.08 smd: 1(0,0)
  rect 2.413x5.08 smd: 2(-4.381,0) 2(4.381,0)
  rect 2.413x5.08 smd far side: 2(-4.381,0) 2(4.381,0)
  silkscreen extent -5.97,-1.4 6.1,3.81, body extent -4.76,-12.45 4.76,1.83, height 4.09
SMA-142-0701-851_V2 [mil] "SMA 50 Ohm, End Launch Jack Receptacle, Tab Contact"
  rect 50x200 smd: 1(0,0)
  rect 95x200 smd: 2(-172.5,0) 2(172.5,0)
  rect 95x200 smd far side: 2(-172.5,0) 2(172.5,0)
  silkscreen extent -235,-55 240,110, body extent -188,-500 188,62, height 161
SMB_V-RJ45 [mm]
  round 2.5 hole 1.5: 1(0,0) 2(-2.5,2.5) 2(-2.5,-2.5) 2(2.5,2.5) 2(2.5,-2.5)
  silkscreen extent -3.15,-3.15 3.15,3.15
SOP50P490X110-10N#1 [mm]
  rrect25% 1.47x0.35 smd mask+0: 1(-2.15,1) 2(-2.15,0.5) 3(-2.15,0) 4(-2.15,-0.5) 5(-2.15,-1) 6(2.15,-1) 7(2.15,-0.5) 8(2.15,0) 9(2.15,0.5) 10(2.15,1)
  silkscreen extent -3.6,-1.5 1.5,1.5, body extent -2.5,-1.5 2.4,1.5, height 1.1
SOP50P490X110-10N#2 [mm]
  rrect25% 1.47x0.28 smd: 1(-2.15,1) 2(-2.15,0.5) 3(-2.15,0) 4(-2.15,-0.5) 5(-2.15,-1) 6(2.15,-1) 7(2.15,-0.5) 8(2.15,0) 9(2.15,0.5) 10(2.15,1)
  silkscreen extent -3.6,-1.5 1.5,1.5, body extent -2.5,-1.5 2.4,1.5, height 1.1
SOT23_N [mm]
  rect 1.15x0.6 smd: 1(-1.27,1.016) 2(-1.27,-1.016) 3(1.27,0)
  silkscreen extent -0.2,-1.5 1.47,1.5, body extent -0.7,-1.5 0.7,1.5, height 1.1
SOT223_L [mm] "SOT223, 4-Leads, Body 6.5x3.5mm, Pitch 2.3mm, Lead Span 7mm, IPC High Density"
  rect 2.1x0.9 smd: 1(-2.85,2.3) 2(-2.85,0) 3(-2.85,-2.3)
  rect 2.1x3.2 smd: 4(2.85,0)
  silkscreen extent -2.97,-3.35 1.5,3.42, body extent -1.85,-3.35 1.85,3.35, height 1.7
SOT363_NXP [mil]
  rect 31x14 smd paste+0 mask+0: 1(-42,25.59) 2(-42,0) 3(-42,-25.59) 4(42,-25.59) 5(42,0) 6(42,25.59)
  silkscreen extent -32,-48 32,48, body extent -44,-44 44,44, height 43
SOT-343_N [mm] "SOT343, 4-Leads, Body 2x1.3 mm, Pitch 1.3mm, Lead Span 2.1mm, IPC Medium Density"
  rect 1.15x0.5 smd: 1(-0.925,0.65) 3(0.925,-0.65) 4(0.925,0.65)
  rect 1.15x0.8 smd: 2(-0.925,-0.5)
  silkscreen extent -0.97,1.25 0.2,1.35
SOT_327XTSA1_INF [mil]
  rect 18x45 smd paste+0 mask+0: 1(-25.59,-35) 2(25.59,-35) 3(0,35)
  silkscreen extent -48,-90 48,32, body extent -44,-44 44,44, height 39

## Part data
+V_IF -V_IF VBB_PA VCC4 VCC_LNA VCC_PA: "Header, 3-Pin", LatestRevisionDate=17-Jul-2002, LatestRevisionNote="Re-released for DXP Platform.", Publisher="Altium Limited"
+V_VCO Vmin: "Conn Unshrouded Header HDR 3 POS 2.54mm Solder ST Top Entry Thru-Hole Bag", Package=None, Availability="In Stock", Check_prices=https://www.snapeda.com/parts/HTSW-103-08-S-S/Samtec/view-part/?ref=eda, MF=Samtec, MP=HTSW-103-08-S-S, Price=None, Purchase-URL=https://pricing.snapeda.com/search/part/HTSW-103-08-S-S/?ref=eda, SnapEDA_Link=https://www.snapeda.com/parts/HTSW-103-08-S-S/Samtec/view-part/?ref=snap
BFR1: library part BFR460, "NPN Bipolar Transistor", Code_JEDEC=TO-226-AA, LatestRevisionDate=17-Jul-2002, LatestRevisionNote="Re-released for DXP Platform.", PackageDescription="TO, Flat Index; 3 In-Line, Axial Leads; Body Dia. 4.8mm; Leads 0.55 x 0.51 mm (max)", PackageReference=TO-226-AA, Published=8-Jun-2000, Publisher="Altium Limited"
BFU590G: library part BFU590G, "NPN Bipolar Transistor", Code_JEDEC=TO-226-AA, LatestRevisionDate=17-Jul-2002, LatestRevisionNote="Re-released for DXP Platform.", PackageDescription="TO, Flat Index; 3 In-Line, Axial Leads; Body Dia. 4.8mm; Leads 0.55 x 0.51 mm (max)", PackageReference=TO-226-AA, Published=8-Jun-2000, Publisher="Altium Limited"
C1 C2 C3 C4 C5 C6 C7 C8 C9 C10 C11 C12 C13 C15 C16 C17 C18 C19 C20 C21 C24 C25 C26 C27 C28 C31 C32 C33 C34 C35 C36 C37 C38 C39 C40 C41 C42 C43 C44 C45 C46 C47 C48 C49 C50 C53 C54 C55 C56 C57 C58 C59 C60 Cn1 Cn2 Cp1 Cp2 Cp3: library part Cap, "Capacitor GRM18 0603", LatestRevisionDate=17-Jul-2002, LatestRevisionNote="Re-released for DXP Platform.", PackageDescription="Polarized Capacitor; 2 Leads", PackageReference=POLAR0.8, Published=8-Jun-2000, Publisher="Altium Limited", Supplier 1=Mouser
C14 C23 C29 C30 C51 C52: library part "Cap Pol2_1", "Polarized Capacitor (Axial)", LatestRevisionDate=17-Jul-2002, LatestRevisionNote="Re-released for DXP Platform.", PackageDescription="Polarized Capacitor; 2 Leads", PackageReference=POLAR0.8, Published=8-Jun-2000, Publisher="Altium Limited"
C22: library part "Cap Pol2_7", "Polarized Capacitor (Axial)", LatestRevisionDate=17-Jul-2002, LatestRevisionNote="Re-released for DXP Platform.", PackageDescription="Polarized Capacitor; 2 Leads", PackageReference=POLAR0.8, Published=8-Jun-2000, Publisher="Altium Limited"
D1: library part "D Varactor", "Variable Capacitance Diode", ComponentLink1Description="Manufacturer Link", ComponentLink1URL=http://www.zetex.com/, DatasheetVersion=Jan-1998, LatestRevisionDate=29-May-2009, LatestRevisionNote="IPC-7351 Footprint Added.", Note="Pin 2 is not connected and not drawn.", PackageDescription="3-Pin SOT-23 Package 0.95 mm Pitch, 2.3 mm Lead Span - Reverse Pinning", PackageReference=SOT23A, PackageVersion=1996, Published=8-Jun-2000, Publisher="Altium Limited"
IF IN_LNA OUT_F OUT_LNA RF T1 T2 T4 T5 VLO: library part SMB, "SMB Straight Connector", LatestRevisionDate=17-Jul-2002, LatestRevisionNote="Re-released for DXP Platform.", Publisher="Altium Limited"
IN_C IN_IF IN_PA OUT_C OUT_IF OUT_PA OUT_VCO Vtune: "SMA Straight Connector", LatestRevisionDate=17-Jul-2002, LatestRevisionNote="Re-released for DXP Platform.", Publisher="Altium Limited"
L1 L2 L3 L4 L5 L6 L7 L8 L9 L10 L11 L12 L13 L14 L17 L18: "Ind RF Chip Wirewound 18nH 5% 100MHz 40Q-Factor 550mA 0603 Paper T/R", Package=None, Availability=Unavailable, MP=LQW18AN18NJ00D, Parameter 1=LQW0603, Price=None
L15 L16: library part LQW18_1, "Inductor LQW Package: 0603 (1608)", Package="1608 Murata", Arrow_Electronics-Purchase-URL=https://snapeda.com/shop?store=Arrow+Electronics&id=1501811, Availability=Good, DigiKey-Purchase-URL=https://snapeda.com/shop?store=DigiKey&id=1501811, MF=Murata, Mouser-Purchase-URL=https://snapeda.com/shop?store=Mouser&id=1501811, MP=LQW18ANR47J00D, Price=None, SnapEDA_Link=https://www.snapeda.com/parts/LQW18ANR47J00D/Murata/view-part/1501811/?ref=snap
Q2: library part BFU550A, "NPN Bipolar Transistor", Code_JEDEC=TO-226-AA, LatestRevisionDate=17-Jul-2002, LatestRevisionNote="Re-released for DXP Platform.", PackageDescription="TO, Flat Index; 3 In-Line, Axial Leads; Body Dia. 4.8mm; Leads 0.55 x 0.51 mm (max)", PackageReference=TO-226-AA, Published=8-Jun-2000, Publisher="Altium Limited"
R1 R2 R3 R4 R5 R6 R7 R8 R9 R10 R11 R12 R13 R14 R15 R16 R17 R18 R19 R20 R21 R22 R23 R24 R25 R26 R27 R28 R29 R30 R31 R32 R33 R34 R35 R36 R37 R38 R39 R40 R41 R42: "Resistor RMC0603", Mfr_Name="Stackpole International"
T3: "SMB Straight Connector", LatestRevisionDate=17-Jul-2002, LatestRevisionNote="Re-released for DXP Platform.", Publisher="Altium Limited"
U1 U4: "No Description Available", Mfr_Name=NXP, RefDes=RefDes, Type=Type
U2: "Diodo", Mfr_Name=Infineon, RefDes=RefDes, Type=Type
U3: "No Description Available", Mfr_Name=TDK, RefDes=RefDes, Type=Type
U5 U7: "No Description Available", Manufacturer=NationalSemiconductor, Mfr_Name="Texas Instruments", Partnumber=LMP7712MM, Characteristics=LMP7712MM18VPrecisonDualLowNoiseCMOSInputOpAmpwithShutdown, ComponentLink1DescBC=LMP7712Datasheet, ComponentLink1URL=http//wwwnationalcom/ds/LM/LMP7712pdf, ComponentLink2DescA4=LMP7712WebPage, ComponentLink2URL=http//wwwnationalcom/pf/LM/LMP7712html, ComponentLink3DescAC=MUB10APackageWebPage, ComponentLink3URL=http//wwwnationalcom/packaging/folders/mub10ahtml, CompType=OpAmpIC, LatestRevisionDate=2009-03-16, LatestRevisionNote=MassUpdate, PackageDescription=10LeadMSOP, PackageReference=MUB10A_L, Published=2009-03-16, Publisher=NationalSemiconductor, RoHS=O, SymbolVersion=2008-07-09, TaMax_C=1250, TaMin_C=-400, Version=B1608
U6: "No Description Available", Mfr_Name="Texas Instruments", RefDes=RefDes, Type=Type

## Via types
v1: diameter 1, hole 0.6, Top Layer - RF to Bottom Layer - PWR, tented both sides, 150 vias
v2: diameter 0.6, hole 0.3, Top Layer - RF to Bottom Layer - PWR, tented both sides, 64 vias
v3: diameter 3.5, hole 3.5, Top Layer - RF to Bottom Layer - PWR, 24 vias

## Nets (pads, with @x,y where several pads share a name; then routed paths per layer and width w, separated by ;. In a path a pad name is that pad's centre, name@x,y a point inside that pad or via, vN(x,y) a via of type N, cw(c..) or ccw(c..) an arc to the next point about the centre after c; other vN are vias at no path point)
B: BFR1.4 C16.1 C17.2 R3.1 R4.2 | length 8.5
  Top Layer - RF w0.368: R4.2@20,-67.325 20,-66.5 20.625,-65.875 C16.1@22.4,-65.875 ; C17.2@23,-67.325 22.95,-67.325 22.4,-66.775 C16.1@22.4,-65.875 ; BFR1.4@25.675,-65.85 25.663,-65.862 23.812,-65.862 R3.1@23.8,-65.875 C16.1@22.4,-65.875
C: BFR1.2 R2.1 | length 4.1
  Top Layer - RF w0.368: R2.1@26.675,-61 26.675,-61.05 27.525,-61.9 BFR1.2@27.525,-64.7